# Altium PCB MADI_nRF52840_PCB_L4.PcbDoc (part 1 of 3)
Units mm, origin at the board's own origin, x right, y up, seen from the top; angles counter-clockwise.
Board outline 30 x 21.59 mm, 4 copper layers (L1, L2 (GND), L3 (GND), L4), stack 1.525 mm thick; 59 components, 58 nets, 307 pads, 195 vias.
Unrouted connection lines stored in the file: 114.
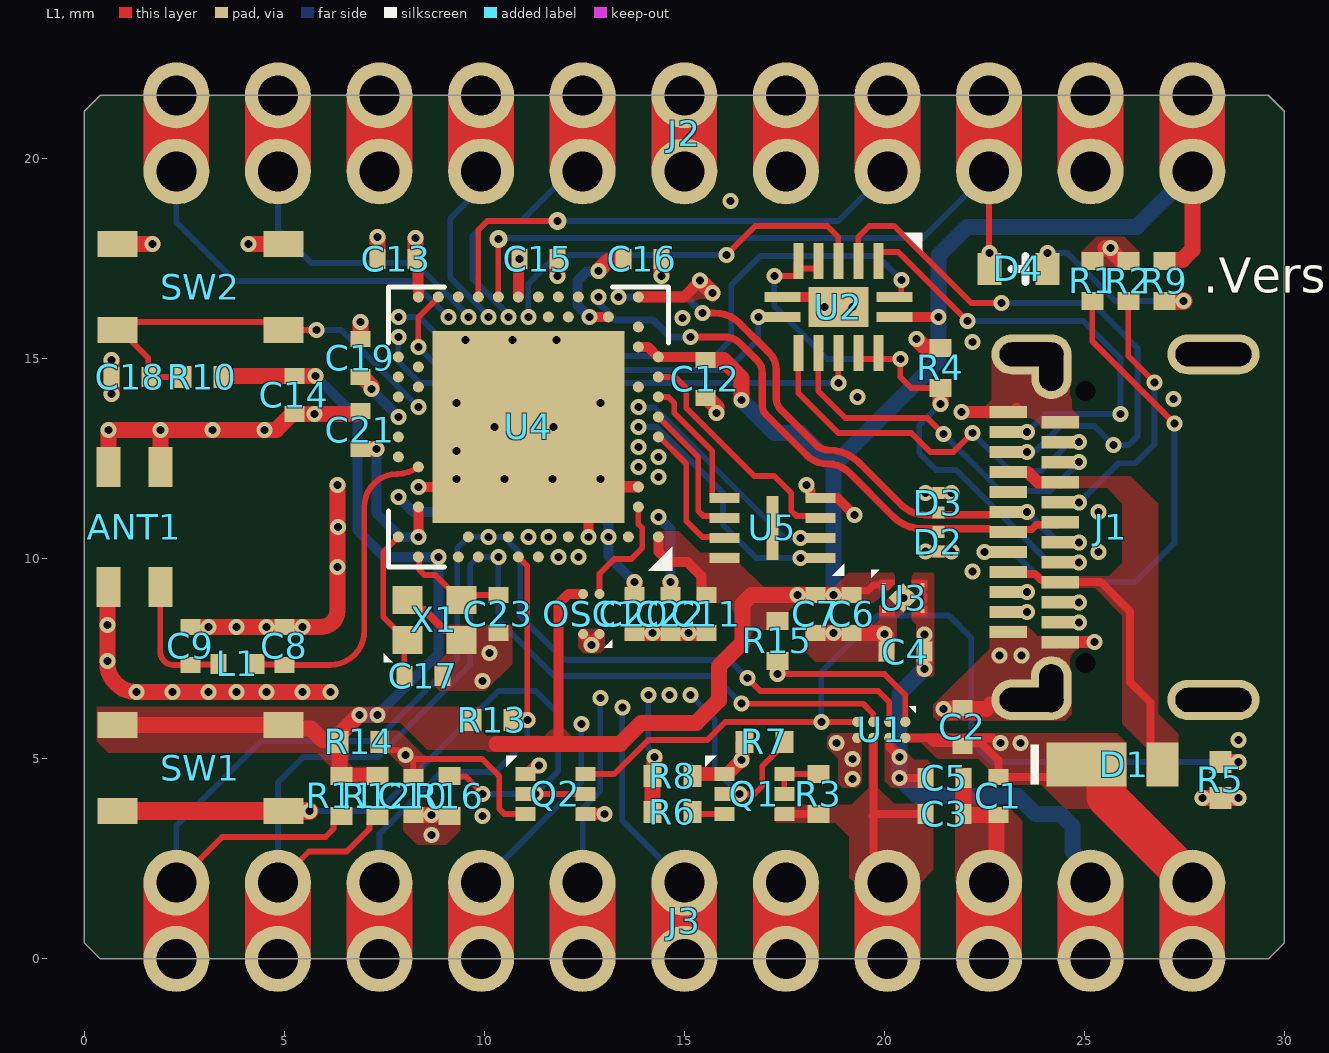
[diagram p0: L1 view]
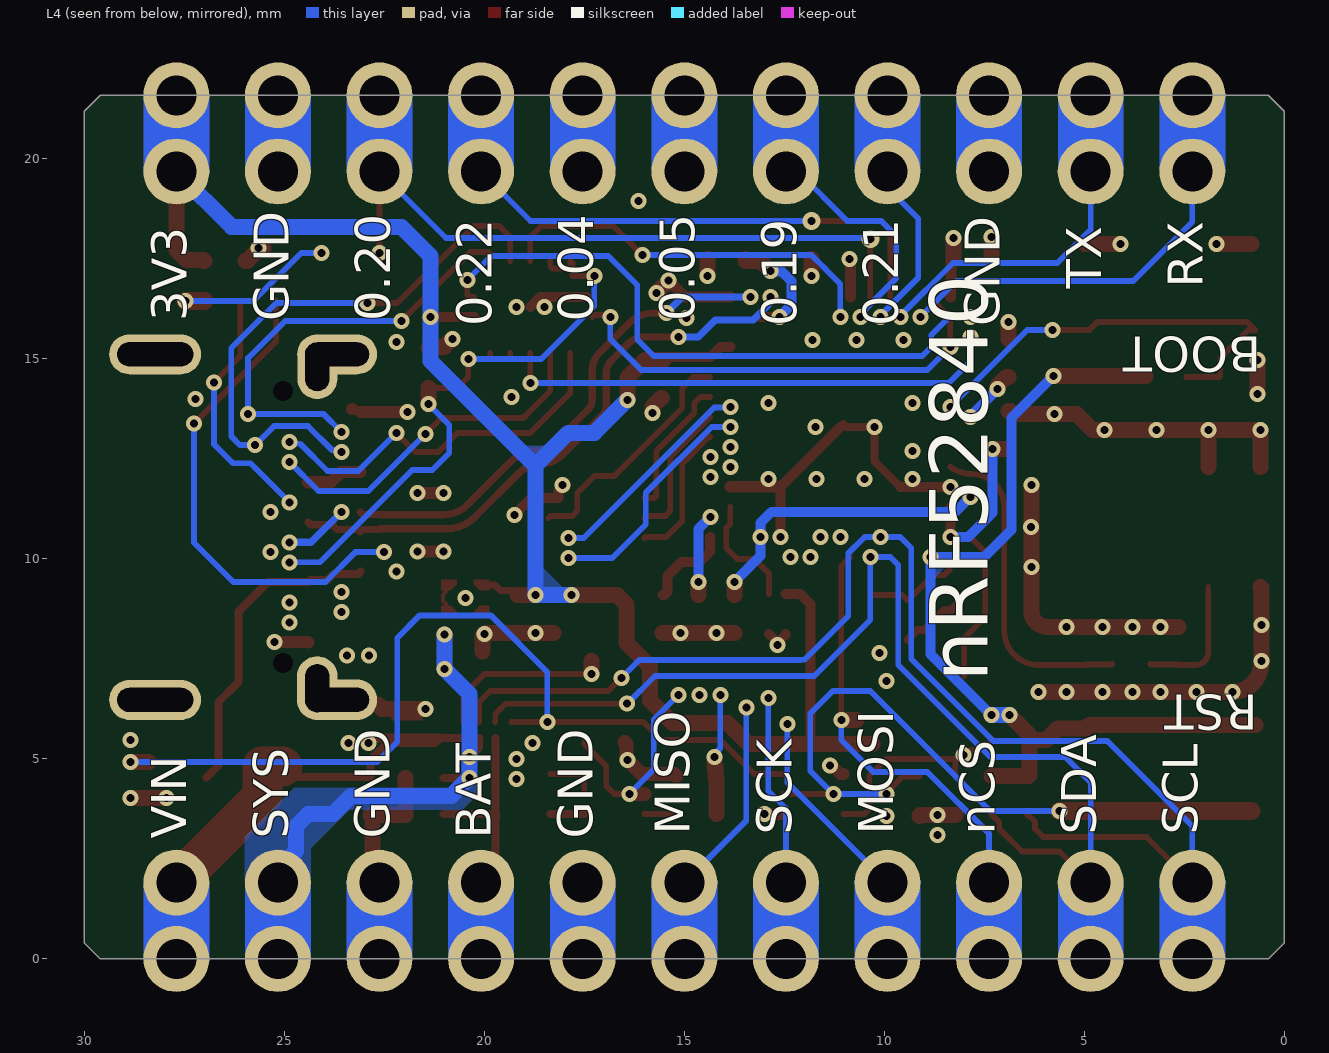
[diagram p1: L4 view, seen from below]
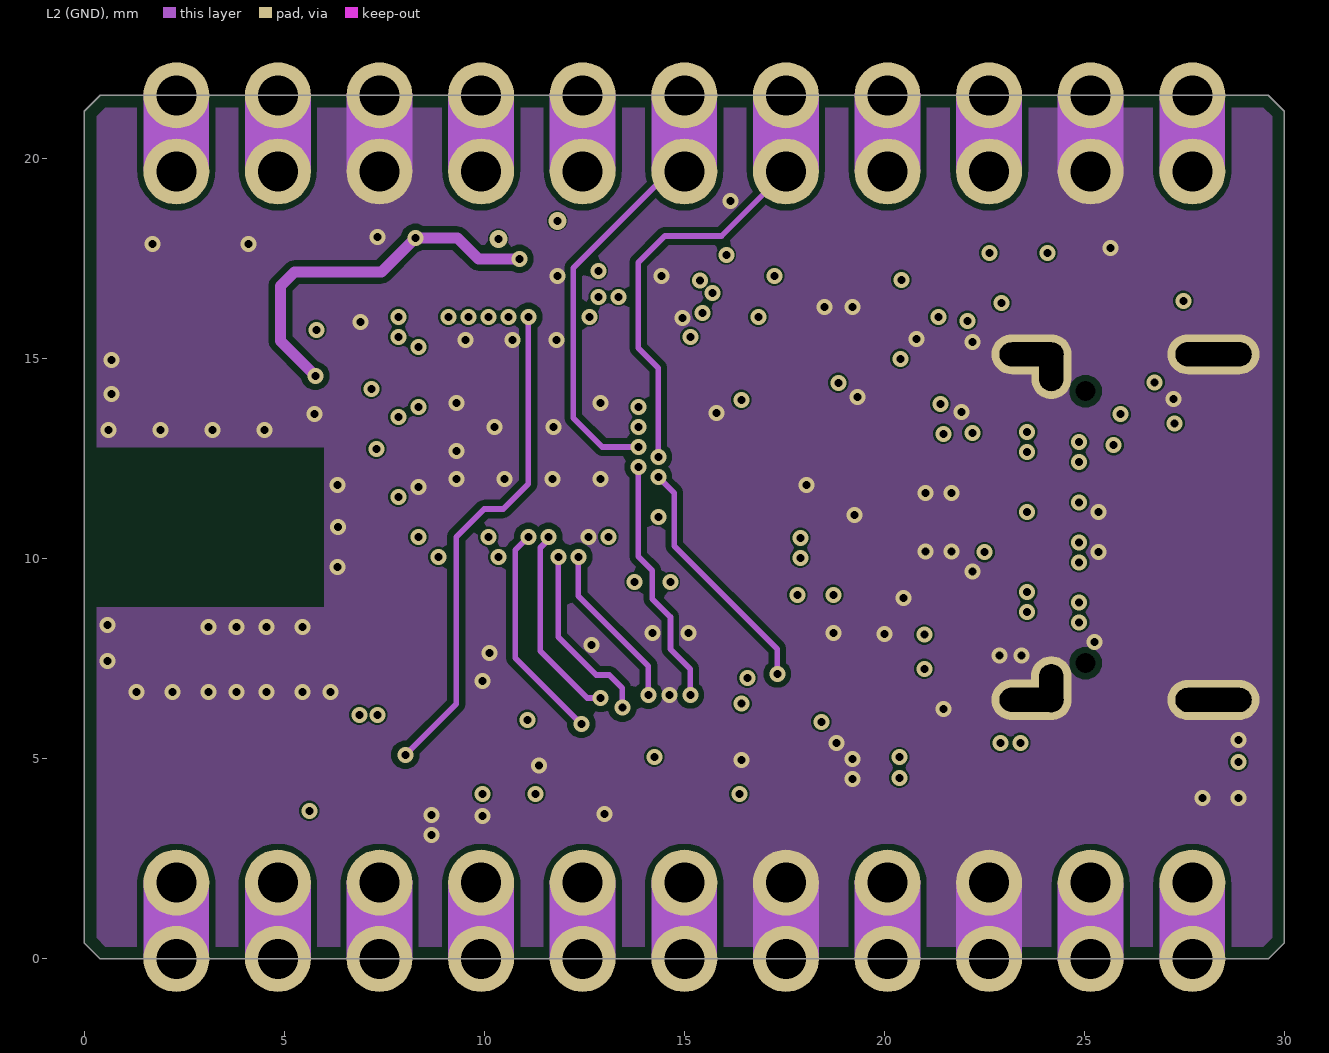
[diagram p2: L2 (GND)]
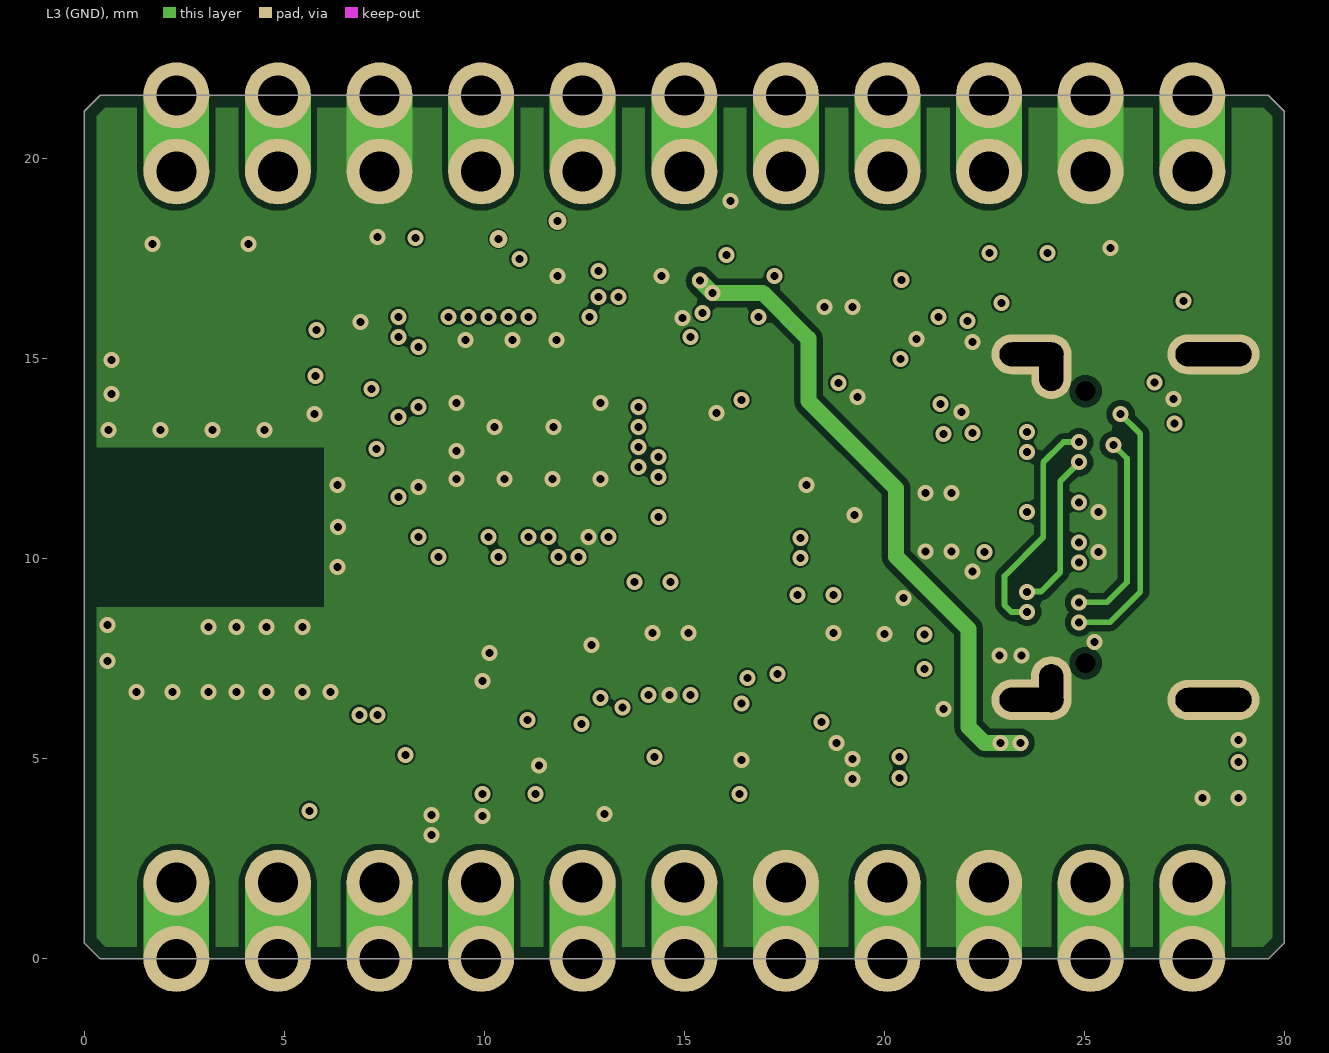
[diagram p3: L3 (GND)]
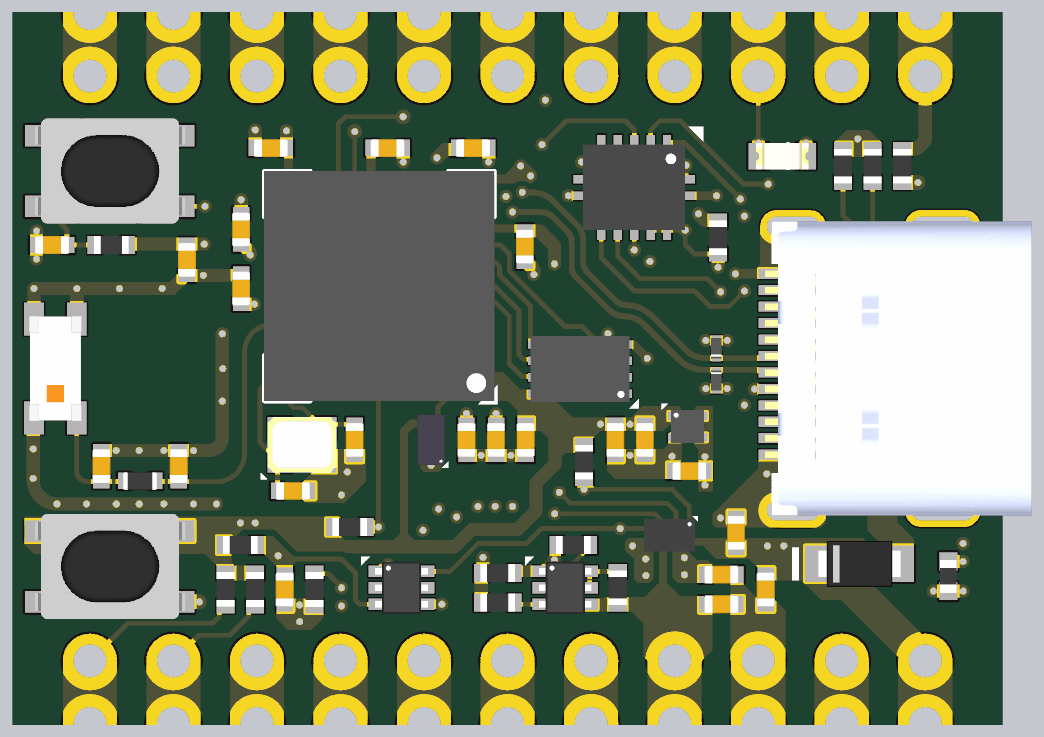
[diagram p5: 3D render of the assembled board from above, using the file's embedded part models]

## Layer stack, top to bottom
Top Solder: solder mask 0.02, Solder Resist, Dk 4.2
L1: signal copper 0.0175
Dielectric 1: prepreg 0.11, ?, Dk 4.5
L2 (GND): signal copper 0.035
Dielectric 2: core 1.2, FR-4, Dk 4.5
L3 (GND): signal copper 0.035
Dielectric 3: prepreg 0.11, ?, Dk 4.5
L4: signal copper 0.0175
Bottom Solder: solder mask 0.02, Solder Resist, Dk 4.2

## Board outline
0,0.4 0.4,0 29.6,0 30,0.4 30,21.19 29.6,21.59 0.4,21.59 0,21.19

## Design rules (kind name [scope] priority, off if disabled: settings)
AcuteAngle [All] p1: minimum=4.49000000000000E+0001 checktracksonly=FALSE
BoardOutlineClearance BoardOutlineClearance_Silk [OnLayer('Top Overlay') or OnLayer('Bottom Overlay')] p1: gap=0 ignorepadtopadclearanceinfootprint=FALSE
BoardOutlineClearance BoardOutlineClearance_EdgeComponents [InComponent('J3')or InComponent('J2')] p2: gap=0 ignorepadtopadclearanceinfootprint=FALSE
BoardOutlineClearance BoardOutlineClearance_Text [IsText] p3: gap=0 ignorepadtopadclearanceinfootprint=FALSE
BoardOutlineClearance [All] p4: gap=0.3 ignorepadtopadclearanceinfootprint=FALSE
Clearance Clearance_Fiducials [InComponentClass('Fiducial') vs InComponentClass('Fiducial')] p1: gap=0 ignorepadtopadclearanceinfootprint=FALSE
Clearance "Clearance_Track and Track" [IsTrack vs IsTrack] p2: gap=0.15 ignorepadtopadclearanceinfootprint=FALSE
Clearance Clearance_NPTH [(InPadClass('NPTH'))] p3: gap=0.2 ignorepadtopadclearanceinfootprint=FALSE
Clearance Clearance_ThruPin [IsThruPin and Not InAnyComponent] p4: gap=0.25 ignorepadtopadclearanceinfootprint=FALSE
Clearance "Clearance_Poly to All" [IsRegion and (not InAnyComponent)] p5: gap=0.15 ignorepadtopadclearanceinfootprint=TRUE
Clearance [All] p6: gap=0.1 ignorepadtopadclearanceinfootprint=FALSE
ComponentClearance ComponentClearance_SW1_SW2 [InComponent('SW1') or InComponent('SW2') vs InComponent('J2') or InComponent('J3')] p1: gap=0 collisioncheckmode=3 verticalgap=0 showdistances=FALSE
ComponentClearance ComponentClearance_U4 [InComponent('U4') vs InComponent('U4')] p2: gap=0 collisioncheckmode=3 verticalgap=0 showdistances=FALSE
ComponentClearance [All] p3: gap=0.1 collisioncheckmode=3 verticalgap=0 showdistances=FALSE
DiffPairsRouting [All] p1: maxlimit=0.17 minlimit=0.1 mostfreqgap=0.17 toplayer_mingap=0.17 toplayer_minwidth=0.18 toplayer_maxwidth=0.18 toplayer_prefwidth=0.18 bottomlayer_mingap=0.17 bottomlayer_minwidth=0.18 bottomlayer_maxwidth=0.18 bottomlayer_prefwidth=0.18 impedanceprofiledriven=TRUE impedanceprofileid={6465BEDB-63ED-48EF-AFED-AA02275A4435} impedanceprofilevalue=90.000000 maxuncoupledlength=12.7
HoleSize [All] p1: absolutevalues=TRUE maxlimit=6.5 minlimit=0.2 maxpercent=80.000 minpercent=20.000
HoleToHoleClearance HoleToHoleClearance_J1 [InComponent('J1') vs InComponent('J1')] p1: gap=0 allowstackedmicrovias=TRUE
HoleToHoleClearance HoleToHoleClearance_1 [All] p2: gap=0.2 allowstackedmicrovias=TRUE
Length [InNetClass('Xtal')] p1: maxlimit=2540 minlimit=0
MinimumAnnularRing MinimumAnnularRing_ThermalPadVias [IsVia and InAnyComponent] p1: minimumring=0.1
MinimumAnnularRing [All] p2: minimumring=0.1
MinimumSolderMaskSliver [All] p1: minsoldermaskwidth=0.03
PlaneClearance [All] p1: clearance=0.2
PlaneConnect "PlaneConnect_GND to PAD" [(InNet('GND') and IsPad)] p1: planeconnectstyle=Relief reliefexpansion=0.3 reliefentries=4 reliefconductorwidth=0.5 reliefairgap=0.2
PlaneConnect [All] p2: planeconnectstyle=Direct reliefexpansion=0.508 reliefentries=4 reliefconductorwidth=0.254 reliefairgap=0.254
PolygonConnect [All] p1: connectstyle=Direct reliefconductorwidth=0.254 reliefentries=4 polygonreliefangle="90 Angle" airgapwidth=0.254
RoutingVias ThermalPadVias [IsVia and InAnyComponent] p1: holewidth=0.2 width=0.45 viastyle="Through Hole" minholewidth=0.2 minwidth=0.4 maxholewidth=0.25 maxwidth=0.5
RoutingVias [All] p2: holewidth=0.3 width=0.6 viastyle="Through Hole" minholewidth=0.2 minwidth=0.4 maxholewidth=0.4 maxwidth=0.8
SMDEntry [All] p1: side=TRUE corner=TRUE anyangle=TRUE
SilkToSilkClearance [All] p1: silktosilkclearance=0
SilkToSolderMaskClearance [IsPad] p1: minsilkscreentomaskgap=0 clearancetoexposedcopper=TRUE
SolderMaskExpansion [All] p1: expansion=0.07 istentingtop=FALSE useseparateexpansions=TRUE expansionbottom=0.07 istentingbottom=FALSE
Width Width_Power [InNet('+*') or InNet('GND')] p1: maxlimit=2.5 minlimit=0.1 preferedwidth=0.4
Width [All] p2: maxlimit=2.5 minlimit=0.1 preferedwidth=0.146 minimp=50.000000 maximp=50.000000 favimp=50.000000
21 further rules are at their usual default settings.

## Classes and differential pairs
net class "GPIO Restrictions": NetU4_A8 NetU4_A10 NetU4_A12 NetU4_A16 NetU4_A20 NetU4_B9 NetU4_B13 NetU4_B15 NetU4_B17 NetU4_B19 NetU4_J24 NetU4_L24 NetU4_P23 NetU4_R24 NetU4_T23 NetU4_U24 NetU4_V23 NetU4_W24 NetU4_Y23 P0.03/SPI_MOSI P0.29/SPI_MISO P0.31/VBAT_MON P1.07/BUTTON P1.12/I2C_SCL P1.13/I2C_SDA SWO
differential pair class DIFF90: USB_D
differential pair USB_D: +USB_D_P -USB_D_N

## Components (designator, comment, footprint, x,y, rotation, side; value= is the part's Value field where it differs from the comment)
ANT1 "2450AT18D0100E" 2450AT18D0100E 1.25,10.795 r90 top
C1 "4.7uF" CAPC1005X06N 22.85,4.075 r90 top
C2 "100nF" CAPC1005X06N 21.95,5.8 r270 top
C3 "1uF" CAPC1005X06N 21.5,3.625 r180 top
C4 "4.7uF" CAPC1005X06N 20.525,7.68 r0 top
C5 "100nF" CAPC1005X06N 21.5,4.525 r180 top
C6 "100nF" CAPC1005X06N 19.175,8.625 r90 top
C7 "1uF" CAPC1005X06N 18.275,8.625 r90 top
C8 "0.8pF" CAPC1005X06N 5,7.825 r270 top
C9 "0.5pF" CAPC1005X06N 2.65,7.825 r270 top
C10 "1uF" CAPC1005X06N 8.225,4.075 r90 top
C11 "1uF" CAPC1005X06N 15.55,8.625 r90 top
C12 "4.7uF" CAPC1005X06N 15.525,14.5 r90 top
C13 "100nF" CAPC1005X06N 7.8,17.5 r0 top
C14 "100nF" CAPC1005X06N 5.25,14.1 r90 top
C15 "100nF" CAPC1005X06N 11.35,17.5 r180 top
C16 "4.7uF" CAPC1005X06N 13.95,17.5 r180 top
C17 "8pF" CAPC1005X06N 8.475,7.075 r0 top
C18 "100nF" CAPC1005X06N 1.15,14.55 r0 top
C19 "1nF" CAPC1005X06N 6.9,15.025 r270 top
C20 "1uF" CAPC1005X06N 13.75,8.625 r90 top
C21 "100pF" CAPC1005X06N 6.9,13.225 r270 top
C22 "100nF" CAPC1005X06N 14.65,8.625 r90 top
C23 "8pF" CAPC1005X06N 10.35,8.625 r270 top
D1 "CUHS20F30,H3F" US2H-DIODE 25.7,4.855 r0 top
D2 "TPESD0201G05V" DIOC0603X03N 21.35,10.43 r270 top
D3 "TPESD0201G05V" DIOC0603X03N 21.35,11.405 r90 top
D4 "YLWGREEN" LDIOC1608X08N 23.35,17.25 r180 top
J1 "TYPEC-324G-BCP24" KUSBX-SMT3-CS-BTR_KYC 26.881,10.795 r90 top locked
J2 "Double_Header_1x11_2.54" 1x11_DOUBLE_HEADER_2.54 15,21.59 r180 top
J3 "Double_Header_1x11_2.54" 1x11_DOUBLE_HEADER_2.54 15,1.905 r180 top
L1 "4.7nH" INDC1005X05N 3.825,7.375 r180 top
OSC1 "SIT1532AC-J5-DCC-32.768E" SIT1532 12.675,8.625 r90 top
Q1 "EM6M2T2R" SOTFL50P160X55-6N 16.75,4.125 r0 top
Q2 "EM6K7T2R" SOTFL50P160X55-6N 11.775,4.125 r0 top
R1 "5.1K" RESC1005X04N 25.2,16.95 r270 top
R2 "5.1K" RESC1005X04N 26.1,16.95 r270 top
R3 "10K" RESC1005X04N 18.35,4.125 r270 top
R4 "10K" RESC1005X04N 21.4,14.775 r270 top
R5 "10K NTC" NTC1005X05N 28.4,4.475 r90 top value=10kR
R6 "360K" RESC1005X04N 14.7,3.675 r0 top value=360kR
R7 "10K" RESC1005X04N 17,5.425 r0 top
R8 "56K" RESC1005X04N 14.7,4.575 r180 top
R9 "510R" RESC1005X04N 27,16.95 r90 top
R10 "10K" RESC1005X04N 2.95,14.55 r0 top
R11 "10K" RESC1005X04N 6.428,4.076 r90 top
R12 "10K" RESC1005X04N 7.325,4.075 r90 top
R13 "10K" RESC1005X04N 10.2,5.975 r180 top
R14 "10K" RESC1005X04N 6.875,5.425 r180 top
R15 "10K" RESC1005X04N 17.325,7.95 r90 top
R16 "10K" RESC1005X04N 9.125,4.075 r90 top
SW1 "SKRPACE010" PTS810 2.9,4.775 r180 top
SW2 "SKRPACE010" PTS810 2.9,16.8 r180 top
U1 "BQ25180YBGR" BGA8C40P2X4_100X155X50_YBG0008 19.925,5.725 r270 top
U2 "74LVC4066BQ,115" QFN50P250X300X100_HS-15N 18.85,16.3 r270 top
U3 "NCP167BMX330TBG" NCP167 20.475,9.025 r0 top
U4 "NRF52840-QIAA-R" NORDIC_NRF52840-QIAA-R7 11.1,13.3 r180 top
U5 "MX25R1635FZUIL0" USON8_3X2 17.2,10.775 r180 top
X1 "32 MHz" XT2016_ECS 8.75,8.475 r0 top

## Footprints (in the part's own frame and the unit in brackets; to place one, negate y for a bottom-side part, rotate by r counter-clockwise, add the part's x,y. Pads: shape width x height; smd on the part's side, far side on the other; paste and mask are expansions set on the pad)
1x11_DOUBLE_HEADER_2.54 [mm]
  round 1.65 hole 1: 1(-12.7,0) 1(-12.7,1.905) 2(-10.16,0) 2(-10.16,1.905) 3(-7.62,0) 3(-7.62,1.905) 4(-5.08,0) 4(-5.08,1.905) 5(-2.54,1.905) 5(-2.54,0) 6(0,1.905) 6(0,0) 7(2.54,1.905) 7(2.54,0) 8(5.08,0) 8(5.08,1.905) 9(7.62,0) 9(7.62,1.905) 10(10.16,0) 10(10.16,1.905) 11(12.7,0) 11(12.7,1.905)
  Multi-Layer region: -13.523,0 -11.875,0 -11.875,1.968 -13.523,1.968
  Multi-Layer region: -10.983,0 -9.335,0 -9.335,1.968 -10.983,1.968
  Multi-Layer region: 6.797,-0.063 8.445,-0.063 8.445,1.905 6.797,1.905
  Multi-Layer region: -8.443,-0.063 -6.795,-0.063 -6.795,1.905 -8.443,1.905
  Multi-Layer region: -5.903,-0.063 -4.255,-0.063 -4.255,1.905 -5.903,1.905
  Multi-Layer region: 1.717,-0.063 3.365,-0.063 3.365,1.905 1.717,1.905
  Multi-Layer region: 4.257,-0.063 5.905,-0.063 5.905,1.905 4.257,1.905
  Multi-Layer region: 9.337,-0.063 10.985,-0.063 10.985,1.905 9.337,1.905
  Multi-Layer region: 11.877,-0.063 13.525,-0.063 13.525,1.905 11.877,1.905
  Multi-Layer region: -0.823,-0.063 0.825,-0.063 0.825,1.905 -0.823,1.905
  Multi-Layer region: -3.363,-0.063 -1.715,-0.063 -1.715,1.905 -3.363,1.905
2450AT18D0100E [mm]
  rect 1x0.6 smd mask+0.05: 1(-1.5,-0.65) 2(1.5,-0.65) 3(1.5,0.65) 4(-1.5,0.65)
  body extent -1.6,-0.8 1.6,0.8, height 1.31
BGA8C40P2X4_100X155X50_YBG0008 [mm] "BGA, 8-Leads, Body 1.00x1.55mmx0.50mm, Pitch 0.40mm"
  round 0.26 smd paste-10 mask+0.05: A1(-0.2,0.6) A2(0.2,0.6) B1(-0.2,0.2) B2(0.2,0.2) C1(-0.2,-0.2) C2(0.2,-0.2) D1(-0.2,-0.6) D2(0.2,-0.6)
  silkscreen extent -0.59,0.69 -0.41,0.86, body extent -0.5,-0.77 0.5,0.77, height 0.5
CAPC1005X06N [mm] "Chip Capacitor, 2-Leads, Body 1.00x0.50mm, IPC Medium Density"
  rect 0.4x0.5 smd mask+0.07: 1(-0.475,0) 2(0.475,0)
  L1 pour cut-out: -0.275,0.25 0.275,0.25 0.275,-0.25 -0.275,-0.25
  body extent -0.53,-0.28 0.53,0.28, height 0.55
DIOC0603X03N [mm] "Chip Diode, 2-Leads, Body 0.62x0.32mm, IPC Medium Density"
  rect 0.3x0.3 smd mask+0.05: 1(-0.245,0) 2(0.245,0)
  body extent -0.31,-0.16 0.31,0.16, height 0.34
INDC1005X05N [mm] "Chip Inductor, 2-Leads, Body 1.00x0.50mm, IPC Medium Density"
  rect 0.4x0.5 smd mask+0.07: 1(-0.475,0) 2(0.475,0)
  L1 pour cut-out: -0.275,0.25 0.275,0.25 0.275,-0.25 -0.275,-0.25
  body extent -0.53,-0.28 0.53,0.28, height 0.55
KUSBX-SMT3-CS-BTR_KYC [mil]
  round 0 hole 19.68 unplated mask+1.97: 0(-133.86,72.89) 0(133.86,72.89)
  rect 12x37 smd mask+1.97: A1(-103.15,148.87) A2(-83.46,148.87) A3(-63.78,148.87) A4(-44.09,148.87) A5(-24.41,148.87) A6(-4.72,148.87) A7(14.96,148.87) A8(34.65,148.87) A9(54.33,148.87) A10(74.02,148.87) A11(93.7,148.87) A12(113.39,148.87) B1(103.15,97.69) B2(83.47,97.69) B3(63.78,97.69) B4(44.09,97.69) B5(24.41,97.69) B6(4.72,97.69) B7(-14.96,97.69) B8(-34.65,97.69) B9(-54.33,97.69) B10(-74.02,97.69) B11(-93.7,97.69) B12(-113.39,97.69)
  oval 39.37x90.55 hole 23.62 slot 74.8 at 90 deg mask+1.97: S1(-170.08,-53.1) S2(170.08,-53.1)
  oval 40x79 hole 23.62 slot 62.99 at 90 deg mask+1.97: S3(-170,126)
  oval 63x40 hole 23.62 slot 47.24 at 0 deg mask+1.97: S3(-158.5,106.5)
  oval 63x39.37 hole 23.62 slot 47.24 at 0 deg mask+1.97: S4(157.52,106.5)
  oval 39.37x78.74 hole 23.62 slot 62.99 at 90 deg mask+1.97: S4(170,126)
  body extent -176,-159 176,160, height 129
LDIOC1608X08N [mm] "LED, 2-Leads, Body 1.60x0.80mm, IPC Medium Density"
  rect 0.6x0.8 smd mask+0.07: A(-0.725,0) K(0.725,0)
  silkscreen extent -0.18,-0.33 0.18,0.33, body extent -0.8,-0.4 0.8,0.4, height 0.56
NCP167 [mm]
  rect 0.1x0.1 smd paste-1 mask+0: 1(-0.48,0.325) 2(-0.48,-0.325) 3(0.48,-0.325) 4(0.48,0.325)
  rect 0.52x0.52 smd rot 135 paste-1 mask+0.05: 5(0,0)
  L1 region: 0.6,-0.455 0.21,-0.455 0.21,-0.345 0.36,-0.195 0.6,-0.195
  L1 region: -0.21,-0.345 -0.21,-0.455 -0.6,-0.455 -0.6,-0.195 -0.36,-0.195
  L1 region: -0.21,0.345 -0.36,0.195 -0.6,0.195 -0.6,0.455 -0.21,0.455
  L1 region: 0.6,0.195 0.36,0.195 0.21,0.345 0.21,0.455 0.6,0.455
  silkscreen extent -0.8,0.5 -0.6,0.7, body extent -0.5,-0.5 0.5,0.5, height 0.39
NORDIC_NRF52840-QIAA-R7 [mm]
  round 0.275 smd paste+0.012 mask+0.05: A8(-1.25,3.25) A10(-0.75,3.25) A12(-0.25,3.25) A14(0.25,3.25) A16(0.75,3.25) A18(1.25,3.25) A20(1.75,3.25) A22(2.25,3.25) A23(2.75,3.25) AA24(3.25,-2.25) AB2(-2.75,-2.5) AC5(-2,-2.75) AC9(-1,-2.75) AC11(-0.5,-2.75) AC13(0,-2.75) AC15(0.5,-2.75) AC17(1,-2.75) AC19(1.5,-2.75) AC21(2,-2.75) AC24(3.25,-2.75) AD2(-2.75,-3.25) AD4(-2.25,-3.25) AD6(-1.75,-3.25) AD8(-1.25,-3.25) AD10(-0.75,-3.25) AD12(-0.25,-3.25) AD14(0.25,-3.25) AD16(0.75,-3.25) AD18(1.25,-3.25) AD20(1.75,-3.25) AD22(2.25,-3.25) AD23(2.75,-3.25) B1(-3.25,2.75) B3(-2.5,2.75) B5(-2,2.75) B7(-1.5,2.75) B9(-1,2.75) B11(-0.5,2.75) B13(0,2.75) B15(0.5,2.75) B17(1,2.75) B19(1.5,2.75) B24(3.25,2.75) C1(-3.25,2.25) D2(-2.75,2) D23(2.75,2) E24(3.25,1.75) F2(-2.75,1.5) F23(2.75,1.5) G1(-3.25,1.25) H2(-2.75,1) H23(2.75,1) J1(-3.25,0.75) J24(3.25,0.75) K2(-2.75,0.5) L1(-3.25,0.25) L24(3.25,0.25) M2(-2.75,0) N1(-3.25,-0.25) N24(3.25,-0.25) P2(-2.75,-0.5) P23(2.75,-0.5) R1(-3.25,-0.75) R24(3.25,-0.75) T2(-2.75,-1) T23(2.75,-1) U1(-3.25,-1.25) U24(3.25,-1.25) V23(2.75,-1.5) W1(-3.25,-1.75) W24(3.25,-1.75) Y2(-2.75,-2) Y23(2.75,-2)
  rect 4.8x4.8 smd paste-3 mask+0.05: EXP(0,0)
  silkscreen extent -3.6,-3.5 3.5,3.6, body extent -3.5,-3.5 3.5,3.5, height 0.86
NTC1005X05N [mm] "NTC, 2-Leads, Body 1.00x0.50mm, IPC Medium Density"
  rect 0.55x0.55 smd mask+0.07: 1(-0.45,0) 2(0.45,0)
  L1 pour cut-out: -0.175,0.275 0.175,0.275 0.175,-0.275 -0.175,-0.275
  body extent -0.5,-0.25 0.5,0.25, height 0.5
PTS810 [mm]
  rect 1x0.65 smd: 1(-2.075,1.075) 2(2.075,1.075) 3(-2.075,-1.075) 4(2.075,-1.075)
  body extent -2.3,-1.6 2.28,1.6, height 2.51
QFN50P250X300X100_HS-15N [mm] "QFN, 14-Leads, Body 2.50x3.00mm, Pitch 0.50mm, Thermal Pad 1.00x1.50mm, IPC Medium Density"
  rect 0.25x0.9 smd mask+0.05: 1(-0.25,1.4) 7(-0.25,-1.4) 8(0.25,-1.4) 14(0.25,1.4)
  rect 0.9x0.25 smd mask+0.05: 2(-1.15,1) 3(-1.15,0.5) 4(-1.15,0) 5(-1.15,-0.5) 6(-1.15,-1) 9(1.15,-1) 10(1.15,-0.5) 11(1.15,0) 12(1.15,0.5) 13(1.15,1)
  rect 1x1.5 smd mask+0.05: 15(0,0)
  silkscreen extent -1.85,1.65 -1.4,2.1, body extent -1.3,-1.55 1.3,1.55, height 1
RESC1005X04N [mm] "Chip Resistor, 2-Leads, Body 1.00x0.50mm, IPC Medium Density"
  rect 0.45x0.55 smd mask+0.05: 1(-0.5,0) 2(0.5,0)
  L1 pour cut-out: -0.275,0.275 0.275,0.275 0.275,-0.275 -0.275,-0.275
  body extent -0.53,-0.28 0.53,0.28, height 0.35
SIT1532 [mm]
  round 0.25 smd mask+0.05: 1(-0.5,-0.205) 2(0.5,-0.205) 3(0.5,0.205) 4(-0.5,0.205)
  silkscreen extent -0.85,-0.53 -0.65,-0.33, body extent -0.77,-0.42 0.77,0.42, height 0.61
SOTFL50P160X55-6N [mm] "SOTFL, 6-Leads, Body 1.60x1.60mm, Pitch 0.50mm, IPC Medium Density"
  rect 0.5x0.35 smd mask+0.05: 1(-0.75,0.5) 2(-0.75,0) 3(-0.75,-0.5) 4(0.75,-0.5) 5(0.75,0) 6(0.75,0.5)
  silkscreen extent -1.23,0.67 -0.95,0.95, body extent -0.8,-0.8 0.8,0.8, height 0.55
US2H-DIODE [mm] "SODFL, 2-Leads, Body 1.60x3.50mm, IPC Medium Density"
  rect 2x1.1 smd: 1(-0.65,0)
  rect 0.8x1.1 smd: 2(1.25,0)
  silkscreen extent -2.05,-0.5 -1.84,0.5, body extent -1.25,-0.7 1.25,0.7, height 0.61
USON8_3X2 [mm]
  rect 0.75x0.254 smd mask+0.05: 1(-1.2,0.75) 2(-1.2,0.25) 3(-1.2,-0.25) 4(-1.2,-0.75) 5(1.2,-0.75) 6(1.2,-0.25) 7(1.2,0.25) 8(1.2,0.75)
  rect 0.3x1.6 smd mask+0.05: 9(0,0)
  silkscreen extent -1.8,0.9 -1.5,1.2, body extent -1.5,-1 1.5,1, height 0.61
XT2016_ECS [mm]
  rect 0.75x0.7 smd mask+0.05: 1(-0.675,-0.5) 2(0.675,-0.5) 3(0.675,0.5) 4(-0.675,0.5)
  silkscreen extent -1.26,-1.06 -1.04,-0.84, body extent -1.05,-0.85 1.05,0.85, height 0.56

## Part data
ANT1: "RF ANT 2.4GHZ CHIP SOLDER SMD", Case/Package=SMD/SMT, Frequency=2.45GHz, Manufacturer=Johanson, Max Power Dissipation=2W, Package Quantity=3000, Supplier Part Number 1=712-1573-1-ND, Bandwidth=100MHz, Category="RF Antennas", ComponentLink1Description=https://datasheet.ciiva.com/29647/2450at18d0100-29647392.pdf?src-supplier=Digi-Key, ComponentLink1URL=https://datasheet.ciiva.com/29647/2450at18d0100-29647392.pdf?src-supplier=Digi-Key, ComponentLink2Description=https://datasheet.ciiva.com/24046/antenna-2450at18d0100-v3-258090-24046431.pdf?src-supplier=Mouser, ComponentLink2URL=https://datasheet.ciiva.com/24046/antenna-2450at18d0100-v3-258090-24046431.pdf?src-supplier=Mouser, Gain=-1dB, Height=0.047inch, Impedance=50R, Length=3.2mm, Manufacturer Part Number=2450AT18D0100E, Mount="Surface Mount", Number of Bands=1, Packaging="Tape and Reel", Power Rating=2W, Pricing 1="1=0.67000, 10=0.58900, 25=0.55360, 100=0.45190, 250=0.41972, 500=0.35720, 1000=0.28576 (USD)", Radiation Hardening=No, Return Loss=-10dB, RoHS=Yes, RoHS Compliant=Yes, Series=-, Stock 1=488138, Supplier 1=Digi-Key, Termination=Solder, Width=1.6mm
C1 C4 C12 C16: library part CL05A475MP5NRNC, "CAP CER 4.7UF 10V X5R 0402", Case Code (Imperial)=0402, Case Code (Metric)=1005, Dielectric=X5R, Manufacturer=Samsung, Max Operating Temperature=85°C, Min Operating Temperature=-55°C, Package Quantity=10000, Supplier Part Number 1=1276-1482-1-ND, Tolerance=20%, Voltage Rating=10V, Capacitance=4.7uF, Case/Package=0402, Category="Ceramic Capacitors", ComponentLink1Description=https://datasheet.ciiva.com/25786/cl05a475mp5nrnc-25786963.pdf?src-supplier=Digi-Key, ComponentLink1URL=https://datasheet.ciiva.com/25786/cl05a475mp5nrnc-25786963.pdf?src-supplier=Digi-Key, ComponentLink2Description=https://datasheet.ciiva.com/16437/cl05b104kq5nnnc-16437353.pdf?src-supplier=Future+Electronics, ComponentLink2URL=https://datasheet.ciiva.com/16437/cl05b104kq5nnnc-16437353.pdf?src-supplier=Future+Electronics, Lead Free="Lead Free", Length=0.039inch, Manufacturer Part Number=CL05A475MP5NRNC, Mount="Surface Mount", Packaging="Tape and Reel", Pricing 1="1=0.10000, 10=0.06800, 50=0.03680, 100=0.03010, 500=0.02150, 1000=0.01689, 2500=0.01535, 5000=0.01412 (USD)", RoHS=Yes, RoHS Compliant=Yes, Series=CL, Stock 1=6997940, Supplier 1=Digi-Key, Thickness=0.022inch, Width=0.02inch
C2 C5 C6 C13 C14 C15 C18 C22: library part CL05B104KO5NNNC, "CAP CER 0.1UF 16V X7R 0402", Case Code (Imperial)=0402, Case Code (Metric)=1005, Dielectric=X7R, Manufacturer=Samsung, Max Operating Temperature=125°C, Min Operating Temperature=-55°C, Package Quantity=1, Supplier Part Number 1=1276-1001-1-ND, Tolerance=10%, Voltage=16V, Capacitance=100nF, Case/Package=0402, Category="Ceramic Capacitors", ComponentLink1Description=https://datasheet.ciiva.com/26920/getdatasheetpartid-359683-26920169.pdf?src-supplier=Verical, ComponentLink1URL=https://datasheet.ciiva.com/26920/getdatasheetpartid-359683-26920169.pdf?src-supplier=Verical, ComponentLink2Description=https://datasheet.ciiva.com/29198/458718-da-01-en-vs-kondensator-0402-29198423.pdf?src-supplier=Conrad, ComponentLink2URL=https://datasheet.ciiva.com/29198/458718-da-01-en-vs-kondensator-0402-29198423.pdf?src-supplier=Conrad, ComponentLink3Description=https://datasheet.ciiva.com/16208/cl05b104kq5nnnc-16208343.pdf?src-supplier=Future+Electronics, ComponentLink3URL=https://datasheet.ciiva.com/16208/cl05b104kq5nnnc-16208343.pdf?src-supplier=Future+Electronics, ComponentLink4Description=https://datasheet.ciiva.com/26309/mlcc-catalogdownload2013-eng-26309003.pdf?src-supplier=Distrelec, ComponentLink4URL=https://datasheet.ciiva.com/26309/mlcc-catalogdownload2013-eng-26309003.pdf?src-supplier=Distrelec, Contact Plating=Tin, Depth=0.5mm, Height=0.5mm, Lead Free="Lead Free", Length=1mm, Manufacturer Part Number=CL05B104KO5NNNC, Material=Ceramic, Mount="Surface Mount", Packaging="Tape and Reel", Pricing 1="1=0.10000, 10=0.02600, 50=0.01400, 100=0.01150, 500=0.00820, 1000=0.00644, 2500=0.00586, 5000=0.00539 (USD)", Radiation Hardening=No, RoHS=Yes, Stock 1=21029609, Supplier 1=Digi-Key, Thickness=0.022inch, Voltage Rating=16V, Voltage Rating (DC)=16V, Width=0.02inch
C3 C7 C10 C11 C20: library part CL05A105KO5NNNC, "CAP CER 1UF 16V X5R 0402", Case Code (Imperial)=0402, Case Code (Metric)=1005, Dielectric=X5R, Manufacturer=Samsung, Max Operating Temperature=85°C, Min Operating Temperature=-55°C, Package Quantity=1, Supplier Part Number 1=1276-1067-1-ND, Tolerance=10%, Voltage=16V, Capacitance=1uF, Case/Package=0402, Category="Ceramic Capacitors", ComponentLink1Description=https://datasheet.ciiva.com/16207/cl05a105ko5nnnc-16207571.pdf?src-supplier=Future+Electronics, ComponentLink1URL=https://datasheet.ciiva.com/16207/cl05a105ko5nnnc-16207571.pdf?src-supplier=Future+Electronics, ComponentLink2Description=https://datasheet.ciiva.com/15195/getdatasheetpartid-355272-15195629.pdf?src-supplier=Verical, ComponentLink2URL=https://datasheet.ciiva.com/15195/getdatasheetpartid-355272-15195629.pdf?src-supplier=Verical, Contact Plating=Tin, Depth=0.5mm, Height=0.5mm, Length=1mm, Manufacturer Part Number=CL05A105KO5NNNC, Mount="Surface Mount", Packaging="Tape and Reel", Pricing 1="1=0.10000, 10=0.04400, 50=0.02400, 100=0.01960, 500=0.01402, 1000=0.01101, 2500=0.01001, 5000=0.00921 (USD)", Radiation Hardening=No, RoHS=Yes, Stock 1=2455652, Supplier 1=Digi-Key, Thickness=0.022inch, Voltage Rating=16V, Width=0.02inch
C8: library part GJM1555C1HR80BB01D, "CAP CER 0.8PF 50V C0G/NP0 0402", Case Code (Imperial)=0402, Case Code (Metric)=1005, Dielectric=C0G, Manufacturer=Murata, Max Operating Temperature=125°C, Min Operating Temperature=-55°C, Package Quantity=1, Supplier Part Number 1=490-6080-1-ND, Voltage=50V, Capacitance=0.8pF, Case/Package=0402, Category="Ceramic Capacitors", ComponentLink1Description=https://datasheet.ciiva.com/6270/product-6270516.pdf?src-supplier=Digi-Key, ComponentLink1URL=https://datasheet.ciiva.com/6270/product-6270516.pdf?src-supplier=Digi-Key, ComponentLink2Description=https://datasheet.ciiva.com/18183/getdatasheetpartid-75095-18183863.pdf?src-supplier=Verical, ComponentLink2URL=https://datasheet.ciiva.com/18183/getdatasheetpartid-75095-18183863.pdf?src-supplier=Verical, ComponentLink3Description=https://datasheet.ciiva.com/6270/partnumbering-e-01-6270517.pdf?src-supplier=Digi-Key, ComponentLink3URL=https://datasheet.ciiva.com/6270/partnumbering-e-01-6270517.pdf?src-supplier=Digi-Key, ComponentLink4Description=https://datasheet.ciiva.com/16440/l0005e-16440469.pdf?src-supplier=Future+Electronics, ComponentLink4URL=https://datasheet.ciiva.com/16440/l0005e-16440469.pdf?src-supplier=Future+Electronics, ComponentLink5Description=https://datasheet.ciiva.com/11616/product-11616838.pdf?src-supplier=Avnet, ComponentLink5URL=https://datasheet.ciiva.com/11616/product-11616838.pdf?src-supplier=Avnet, ComponentLink6Description=https://datasheet.ciiva.com/6270/partnumbering-e-01-6270552.pdf?src-supplier=Digi-Key, ComponentLink6URL=https://datasheet.ciiva.com/6270/partnumbering-e-01-6270552.pdf?src-supplier=Digi-Key, Construction=Flat, Depth=0.5mm, Height=0.5mm, Lead Free="Lead Free", Length=1mm, Manufacturer Part Number=GJM1555C1HR80BB01D, Mount="Surface Mount", Packaging="Tape and Reel", Pricing 1="1=0.20000, 10=0.13900, 50=0.07920, 100=0.06560, 500=0.04596, 1000=0.03805, 2500=0.03542, 5000=0.03240 (USD)", Radiation Hardening=No, RoHS=Yes, RoHS Compliant=Yes, Series=GJM, Stock 1=91134, Supplier 1=Digi-Key, Termination=SMD/SMT, Thickness=0.022inch, Voltage Rating=50V, Voltage Rating (DC)=50V, Width=0.02inch
C9: library part GJM1555C1HR50BB01D, "CAP CER 0.5PF 50V C0G/NP0 0402", Case Code (Imperial)=0402, Case Code (Metric)=1005, Dielectric=C0G, Manufacturer=Murata, Max Operating Temperature=125°C, Min Operating Temperature=-55°C, Package Quantity=1, Supplier Part Number 1=490-6077-1-ND, Temperature Coefficient=30ppm/°C, Voltage=50V, Capacitance=0.5pF, Case/Package=0402, Category="Ceramic Capacitors", ComponentLink1Description=https://datasheet.ciiva.com/6270/product-6270544.pdf?src-supplier=Digi-Key, ComponentLink1URL=https://datasheet.ciiva.com/6270/product-6270544.pdf?src-supplier=Digi-Key, ComponentLink2Description=https://datasheet.ciiva.com/11789/0900766b80ef921d-11789028.pdf?src-supplier=RSComponents, ComponentLink2URL=https://datasheet.ciiva.com/11789/0900766b80ef921d-11789028.pdf?src-supplier=RSComponents, ComponentLink3Description=https://datasheet.ciiva.com/5694/1700184-5694998.pdf?src-supplier=Farnell, ComponentLink3URL=https://datasheet.ciiva.com/5694/1700184-5694998.pdf?src-supplier=Farnell, ComponentLink4Description=https://datasheet.ciiva.com/18183/getdatasheetpartid-153078-18183862.pdf?src-supplier=Verical, ComponentLink4URL=https://datasheet.ciiva.com/18183/getdatasheetpartid-153078-18183862.pdf?src-supplier=Verical, ComponentLink5Description=https://datasheet.ciiva.com/8030/1303334-8030134.pdf?src-supplier=Element14, ComponentLink5URL=https://datasheet.ciiva.com/8030/1303334-8030134.pdf?src-supplier=Element14, ComponentLink6Description=https://datasheet.ciiva.com/16392/l0005e-16392585.pdf?src-supplier=Future+Electronics, ComponentLink6URL=https://datasheet.ciiva.com/16392/l0005e-16392585.pdf?src-supplier=Future+Electronics, ComponentLink7Description=https://datasheet.ciiva.com/17451/product-17451306.pdf?src-supplier=Avnet+Europe, ComponentLink7URL=https://datasheet.ciiva.com/17451/product-17451306.pdf?src-supplier=Avnet+Europe, ComponentLink8Description=https://datasheet.ciiva.com/11617/product-11617149.pdf?src-supplier=Avnet, ComponentLink8URL=https://datasheet.ciiva.com/11617/product-11617149.pdf?src-supplier=Avnet, ComponentLink9Description=https://datasheet.ciiva.com/6270/partnumbering-e-01-6270543.pdf?src-supplier=Digi-Key, ComponentLink9URL=https://datasheet.ciiva.com/6270/partnumbering-e-01-6270543.pdf?src-supplier=Digi-Key, Construction=Flat, Depth=0.5mm, Height=0.5mm, Lead Free="Lead Free", Lead Pitch=0.3mm, Length=1mm, Manufacturer Part Number=GJM1555C1HR50BB01D, Mount="Surface Mount", Number of Pins=2, Packaging="Tape and Reel", Pricing 1="1=0.20000, 10=0.13900, 50=0.07920, 100=0.06560, 500=0.04596, 1000=0.03805, 2500=0.03542, 5000=0.03240 (USD)", Radiation Hardening=No, REACH SVHC="No SVHC", RoHS=Yes, RoHS Compliant=Yes, Series=GJM, Stock 1=81547, Supplier 1=Digi-Key, Termination=SMD/SMT, Thickness=0.022inch, Voltage Rating=50V, Voltage Rating (DC)=50V, Width=0.02inch
C17 C23: library part CC0402CRNPO9BN8R0, "CAP CER 8PF 50V C0G/NP0 0402", Capacitor Type=Ceramic, Case/Package=0402, Manufacturer=Yageo, Max Operating Temperature=125°C, Min Operating Temperature=-55°C, Package Shape=Rectangular, Rated DC Voltage (URdc)=50V, Supplier Part Number 1=311-3328-1-ND, Temperature Characteristics Code=C0G, Tolerance  (fill in as +-)=3.12%, Category="Ceramic Capacitors", ComponentLink1Description=https://datasheet.ciiva.com:443/pdfs/VipMasterIC/IC/YAGO/YAGO-S-A0002788200/YAGO-S-A0002788200-1.pdf?src-supplier=IHS+Markit, ComponentLink1URL=https://datasheet.ciiva.com:443/pdfs/VipMasterIC/IC/YAGO/YAGO-S-A0002788200/YAGO-S-A0002788200-1.pdf?src-supplier=IHS+Markit, ComponentLink2Description=http://www.mouser.com/ds/2/447/Yageo_UPY-GP_NP0_16V-to-50V_9-358835.pdf?src-supplier=Mouser, ComponentLink2URL=http://www.mouser.com/ds/2/447/Yageo_UPY-GP_NP0_16V-to-50V_9-358835.pdf?src-supplier=Mouser, ComponentLink3Description=http://www.yageo.com/documents/recent/UPY-GP_NP0_16V-to-50V_16.pdf?src-supplier=Digi-Key, ComponentLink3URL=http://www.yageo.com/documents/recent/UPY-GP_NP0_16V-to-50V_16.pdf?src-supplier=Digi-Key, ComponentLink4Description=https://www.yageo.com/upload/media/product/productsearch/datasheet/mlcc/UPY-GP_NP0_16V-to-50V_18.pdf?src-supplier=Digi-Key, ComponentLink4URL=https://www.yageo.com/upload/media/product/productsearch/datasheet/mlcc/UPY-GP_NP0_16V-to-50V_18.pdf?src-supplier=Digi-Key, ComponentLink5Description=http://www.yageo.com/documents/recent/UPY-GP_NP0_16V-to-50V_9.pdf?src-supplier=Future+Electronics, ComponentLink5URL=http://www.yageo.com/documents/recent/UPY-GP_NP0_16V-to-50V_9.pdf?src-supplier=Future+Electronics, ComponentLink6Description=http://www.yageo.com/NewPortal/yageodocoutput?fileName=/pdf/MLCC/UPY-GP_NP0_16V-to-50V_14.pdf&src-supplier=Digi-Key, ComponentLink6URL=http://www.yageo.com/NewPortal/yageodocoutput?fileName=/pdf/MLCC/UPY-GP_NP0_16V-to-50V_14.pdf&src-supplier=Digi-Key, Dielectric Material=Ceramic, JESD-609 Code=e3, Manufacturer Part Number=CC0402CRNPO9BN8R0, Mounting Technology="Surface Mount", Multilayer=Yes, Packaging="Tape and Reel", Pins=2, Pricing 1="1=0.10000, 10=0.02500, 50=0.01360, 100=0.01110, 500=0.00796, 1000=0.00625, 2500=0.00568, 5000=0.00523 (USD)", Reach SVHC Compliant=Yes, RoHS=Yes, RoHS Compliant=Yes, Stock 1=511644, Supplier 1=Digi-Key, Terminal Finish=Nickel, Termination=Wraparound, Tolerance (fill in as +-)=3.12%
C19: library part CL05B102KB5NNNC, "CAP CER 1000PF 50V X7R 0402", Case Code (Imperial)=0402, Case Code (Metric)=1005, Dielectric=X7R, Manufacturer=Samsung, Max Operating Temperature=125°C, Min Operating Temperature=-55°C, Package Quantity=1, Supplier Part Number 1=1276-1032-6-ND, Tolerance=10%, Voltage=50V, Capacitance=1nF, Case/Package=0402, Category="Ceramic Capacitors", ComponentLink1Description=https://datasheet.ciiva.com/25806/cl05b102kb5nnnc-25806896.pdf?src-supplier=Digi-Key, ComponentLink1URL=https://datasheet.ciiva.com/25806/cl05b102kb5nnnc-25806896.pdf?src-supplier=Digi-Key, ComponentLink2Description=https://datasheet.ciiva.com/15227/getdatasheetpartid-355276-15227190.pdf?src-supplier=Verical, ComponentLink2URL=https://datasheet.ciiva.com/15227/getdatasheetpartid-355276-15227190.pdf?src-supplier=Verical, ComponentLink3Description=https://datasheet.ciiva.com/29198/459222-da-01-en-vs-kondensator-0402-29198191.pdf?src-supplier=Conrad, ComponentLink3URL=https://datasheet.ciiva.com/29198/459222-da-01-en-vs-kondensator-0402-29198191.pdf?src-supplier=Conrad, ComponentLink4Description=https://datasheet.ciiva.com/26309/mlcc-catalogdownload2013-eng-26309020.pdf?src-supplier=Distrelec, ComponentLink4URL=https://datasheet.ciiva.com/26309/mlcc-catalogdownload2013-eng-26309020.pdf?src-supplier=Distrelec, Contact Plating=Tin, Depth=0.5mm, Height=0.5mm, Lead Free="Lead Free", Length=1mm, Manufacturer Part Number=CL05B102KB5NNNC, Material=Ceramic, Mount="Surface Mount", Packaging="Tape and Reel", Pricing 1="1=0.10000, 10=0.03300, 50=0.01800, 100=0.01480, 500=0.01054, 1000=0.00829, 2500=0.00754, 5000=0.00693 (USD)", Radiation Hardening=No, RoHS=Yes, Stock 1=12036728, Supplier 1=Digi-Key, Thickness=0.022inch, Voltage Rating=50V, Voltage Rating (DC)=50V, Width=0.02inch
C21: library part CL05C101JB5NNNC, "CAP CER 100PF 50V C0G/NP0 0402", Case Code (Imperial)=0402, Case Code (Metric)=1005, Dielectric=C0G, Manufacturer=Samsung, Max Operating Temperature=125°C, Min Operating Temperature=-55°C, Package Quantity=10000, Supplier Part Number 1=1276-1025-1-ND, Temperature Coefficient=300ppm/°C, Tolerance=5%, Voltage=50V, Capacitance=100pF, Case/Package=0402, Category="Ceramic Capacitors", ComponentLink1Description=https://datasheet.ciiva.com/15195/getdatasheetpartid-357528-15195665.pdf?src-supplier=Verical, ComponentLink1URL=https://datasheet.ciiva.com/15195/getdatasheetpartid-357528-15195665.pdf?src-supplier=Verical, ComponentLink2Description=https://datasheet.ciiva.com/29198/458492-da-01-en-vs-kondensator-0402-29198529.pdf?src-supplier=Conrad, ComponentLink2URL=https://datasheet.ciiva.com/29198/458492-da-01-en-vs-kondensator-0402-29198529.pdf?src-supplier=Conrad, ComponentLink3Description=https://datasheet.ciiva.com/16379/cl05b104kq5nnnc-16379226.pdf?src-supplier=Future+Electronics, ComponentLink3URL=https://datasheet.ciiva.com/16379/cl05b104kq5nnnc-16379226.pdf?src-supplier=Future+Electronics, Construction=Flat, Contact Plating=Tin, Depth=0.5mm, Height=0.5mm, Length=1mm, Manufacturer Part Number=CL05C101JB5NNNC, Material=Ceramic, Mount="Surface Mount", Packaging="Tape and Reel", Pricing 1="1=0.10000, 10=0.02000, 50=0.01080, 100=0.00880, 500=0.00628, 1000=0.00493, 2500=0.00448, 5000=0.00412 (USD)", Radiation Hardening=No, RoHS=Yes, RoHS Compliant=Yes, Series=CL, Stock 1=4859529, Supplier 1=Digi-Key, Thickness=0.022inch, Voltage Rating=50V, Width=0.02inch
D1: "DIODE SCHOTTKY 30V 2A US2H", Manufacturer=Toshiba, Supplier Part Number 1=CUHS20F30H3FCT-ND, Manufacturer Part Number=CUHS20F30,H3F, Pricing 1="1=0.37000, 10=0.30200, 100=0.20540, 500=0.15408, 1000=0.11556 (USD)", RoHS=No, Stock 1=70970, Supplier 1=Digi-Key
D2 D3: "TVS DIODE 5.5VWM 40VC 0201", Case/Package=SMD/SMT, Clamping Voltage=40V, Manufacturer="TECH PUBLIC", Max Operating Temperature=125°C, Min Operating Temperature=-55°C, Peak Pulse Current=3A, Power Line Protection=No, Resistor Type=Zener, Reverse Standoff Voltage=5.5V, Category=Diodes, ComponentLink1Description=https://datasheet.lcsc.com/lcsc/2005211235_TECH-PUBLIC-TPESD0201G15V_C558460.pdf, ComponentLink1URL=https://datasheet.lcsc.com/lcsc/2005211235_TECH-PUBLIC-TPESD0201G15V_C558460.pdf, Halogen Free="Halogen Free", Lead Free="Lead Free", Manufacturer Part Number=TPESD0201G05V, Mount="Surface Mount", Number of Bidirectional Channels=1, Packaging="Tape and Reel", RoHS=Yes, RoHS Compliant=Yes
D4: library part 19-217/G7C-AN1P2/3T, "LED YLW/GREEN DIFFUSED 1608 SMD", Color=Green,Yellow, Forward Voltage=2V, Manufacturer=Everlight, Supplier Part Number 1=5203-19-217/G7C-AN1P2/3T, Category=LEDs, ComponentLink1Description=https://datasheet.ciiva.com/48679/19-217-g7c-an1p2-3t-48679179.pdf?src-supplier=Avnet, ComponentLink1URL=https://datasheet.ciiva.com/48679/19-217-g7c-an1p2-3t-48679179.pdf?src-supplier=Avnet, Lead Free="Lead Free", Lens Style=Clear,Diffused,Colorless,Rectangular, Manufacturer Part Number=19-217/G7C-AN1P2/3T, Mounting Technology="Surface Mount", Number of LEDs=1, Pins=2, Pricing 1="2635=0.01900, 6250=0.01600, 10000=0.01500, 13335=0.01500, 17860=0.01400, 23080=0.01300 (USD)", RoHS=Yes, RoHS Compliant=Yes, Stock 1=152500, Supplier 1="Win Source Electronics", Viewing Angle=120°
J1: "CONN RCPT USB TYPE C, SMT PINS, TH SHIELD", Manufacturer=XUNPU, Category="USB Connectors", ComponentLink1Description=https://www.lcsc.com/product-detail/USB-Connectors_XUNPU-TYPEC-324G-BCP24_C920230.html, ComponentLink1URL=https://www.lcsc.com/product-detail/USB-Connectors_XUNPU-TYPEC-324G-BCP24_C920230.html, Manufacturer Part Number=TYPEC-324G-BCP24
L1: library part CLH1005T-4N7S-S-NP, "FIXED IND 4.7NH 400MA 180 MOHM", Case/Package=0402, Current Rating=300mA, DC Resistance (DCR)=230mR, Inductor Type=MONOLITHIC, Manufacturer="Chilisin Elec", Max Operating Temperature=125°C, Package Quantity=10000, Self Resonant Frequency=6GHz, Test Frequency=100MHz, Category="Fixed Inductors", ComponentLink1Description=https://datasheet.ciiva.com/11801/0900766b80f10808-11801428.pdf?src-supplier=RSComponents, ComponentLink1URL=https://datasheet.ciiva.com/11801/0900766b80f10808-11801428.pdf?src-supplier=RSComponents, ComponentLink2Description=https://datasheet.ciiva.com/8509/l0075s0083lqg15hn-8509689.pdf?src-supplier=Avnet, ComponentLink2URL=https://datasheet.ciiva.com/8509/l0075s0083lqg15hn-8509689.pdf?src-supplier=Avnet, ComponentLink3Description=https://datasheet.ciiva.com/4976/o05e-4976780.pdf?src-supplier=Mouser, ComponentLink3URL=https://datasheet.ciiva.com/4976/o05e-4976780.pdf?src-supplier=Mouser, ComponentLink4Description=https://datasheet.ciiva.com/8002/66026-8002543.pdf?src-supplier=Element14, ComponentLink4URL=https://datasheet.ciiva.com/8002/66026-8002543.pdf?src-supplier=Element14, ComponentLink5Description=https://datasheet.ciiva.com/1063/l0075s0083lqg15hn-1063843.pdf?src-supplier=Digi-Key, ComponentLink5URL=https://datasheet.ciiva.com/1063/l0075s0083lqg15hn-1063843.pdf?src-supplier=Digi-Key, ComponentLink6Description=https://datasheet.ciiva.com/8510/l0075s0083lqg15hn-8510764.pdf?src-supplier=Avnet, ComponentLink6URL=https://datasheet.ciiva.com/8510/l0075s0083lqg15hn-8510764.pdf?src-supplier=Avnet, DC Current=300mA, Depth=0.55mm, Height=0.02inch, Height - Seated (Max)=0.022inch, Inductance=4.7nH, Lead Free="Lead Free", Length=1mm, Manufacturer Part Number=CLH1005T-4N7S-S-NP, Max DC Current=300mA, Military Standard=Not, Mount="Surface Mount", Number of Pins=2, Packaging="Tape and Reel", Q Factor=8, Radiation Hardening=No, Rated Current-Max=300mA, REACH SVHC="No SVHC", RoHS=Yes, RoHS Compliant=Yes, Series=LQG15HS, Shielding=Unshielded, Termination=SMD/SMT, Width=0.02inch
OSC1: "MEMS OSC XO 32.7680KHZ LVCMOS", Frequency=32.768kHz, Frequency Stability=75ppm, Manufacturer=SiTime, Max Operating Temperature=70°C, Max Supply Current=1.3uA, Min Operating Temperature=-10°C, Supplier Part Number 1=1473-1313-1-ND, Category=Oscillators, ComponentLink1Description=http://www.sitime.com/products/datasheets/sit1532/SiT1532-datasheet.pdf?src-supplier=Digi-Key, ComponentLink1URL=http://www.sitime.com/products/datasheets/sit1532/SiT1532-datasheet.pdf?src-supplier=Digi-Key, ComponentLink2Description=https://www.sitime.com/datasheet/SiT1532?src-supplier=Digi-Key, ComponentLink2URL=https://www.sitime.com/datasheet/SiT1532?src-supplier=Digi-Key, Height=0.024inch, Length=0.061inch, Manufacturer Part Number=SIT1532AC-J5-DCC-32.768E, Mount="Surface Mount", Packaging="Tape and Reel", Pricing 1="1=1.25000, 10=1.10300, 50=1.03120, 100=0.91120, 500=0.86328 (USD)", RoHS=Yes, Stock 1=4488, Supplier 1=Digi-Key, Width=0.033inch
Q1: "MOSFET N/P-CH 20V 0.2A EMT6", Case/Package=SOT-23-5, Continuous Drain Current (ID)=200mA, Drain to Source Resistance=1R, Drain to Source Voltage (Vdss)=20V, Input Capacitance=25pF, Manufacturer=Rohm, Max Operating Temperature=150°C, Max Power Dissipation=150mW, Min Operating Temperature=-55°C, Package Quantity=1, Supplier Part Number 1=EM6M2T2RCT-ND, Category=MOSFETs, ComponentLink1Description=https://datasheet.ciiva.com/6387/em6m2-6387413.pdf?src-supplier=Digi-Key, ComponentLink1URL=https://datasheet.ciiva.com/6387/em6m2-6387413.pdf?src-supplier=Digi-Key, ComponentLink2Description=https://datasheet.ciiva.com/6387/em6m2-6387415.pdf?src-supplier=Digi-Key, ComponentLink2URL=https://datasheet.ciiva.com/6387/em6m2-6387415.pdf?src-supplier=Digi-Key, ComponentLink3Description=https://datasheet.ciiva.com/6387/em6m2-6387417.pdf?src-supplier=Digi-Key, ComponentLink3URL=https://datasheet.ciiva.com/6387/em6m2-6387417.pdf?src-supplier=Digi-Key, Drain-source On Resistance-Max=1R, FET Type="N and P-Channel", Lead Free="Lead Free", Manufacturer Part Number=EM6M2T2R, Mounting Technology="Surface Mount", Packaging="Tape and Reel", Pins=6, Pricing 1="1=0.58000, 10=0.49600, 100=0.37030, 500=0.29096, 1000=0.22482, 2000=0.20499 (USD)", Radiation Hardening=No, Rds On Max=1R, RoHS=Yes, RoHS Compliant=Yes, Stock 1=90900, Supplier 1=Digi-Key
Q2: "MOSFET 2N-CH 20V 0.2A EMT6", Continuous Drain Current (ID)=200mA, Drain to Source Resistance=1.2R, Drain to Source Voltage (Vdss)=20V, Gate to Source Voltage (Vgs)=8V, Input Capacitance=25pF, Manufacturer=Rohm, Max Operating Temperature=150°C, Max Power Dissipation=150mW, Min Operating Temperature=-55°C, Package Quantity=8000, Supplier Part Number 1=EM6K7T2RCT-ND, Category=MOSFETs, ComponentLink1Description=https://datasheet.ciiva.com/6387/em6k7-6387446.pdf?src-supplier=Digi-Key, ComponentLink1URL=https://datasheet.ciiva.com/6387/em6k7-6387446.pdf?src-supplier=Digi-Key, ComponentLink2Description=https://datasheet.ciiva.com/13051/em6k7-209726-13051863.pdf?src-supplier=Mouser, ComponentLink2URL=https://datasheet.ciiva.com/13051/em6k7-209726-13051863.pdf?src-supplier=Mouser, ComponentLink3Description=https://datasheet.ciiva.com/11162/em6k7-11162107.pdf?src-supplier=Avnet, ComponentLink3URL=https://datasheet.ciiva.com/11162/em6k7-11162107.pdf?src-supplier=Avnet, ComponentLink4Description=https://datasheet.ciiva.com/6387/em6k7-6387451.pdf?src-supplier=Digi-Key, ComponentLink4URL=https://datasheet.ciiva.com/6387/em6k7-6387451.pdf?src-supplier=Digi-Key, ComponentLink5Description=https://datasheet.ciiva.com/16437/em6k7-16437677.pdf?src-supplier=Future+Electronics, ComponentLink5URL=https://datasheet.ciiva.com/16437/em6k7-16437677.pdf?src-supplier=Future+Electronics, Drain-source On Resistance-Max=1.2R, Fall Time=10ns, FET Type="2 N-Channel", Lead Free="Lead Free", Manufacturer Part Number=EM6K7T2R, Mounting Technology="Surface Mount", Packaging="Tape and Reel", Pins=6, Pricing 1="1=0.54000, 10=0.43900, 100=0.29900, 500=0.22428, 1000=0.16821, 2000=0.15419 (USD)", Radiation Hardening=No, Rds On Max=1.2R, Rise Time=10ns, RoHS=Yes, RoHS Compliant=Yes, Stock 1=15154, Supplier 1=Digi-Key, Turn-Off Delay Time=15ns, Turn-On Delay Time=5ns
R1 R2: library part RC0402FR-075K1L, "RES SMD 5.1K OHM 1% 1/16W 0402", Case Code (Imperial)=0402, Case Code (Metric)=1005, Manufacturer=Yageo, Max Operating Temperature=155°C, Max Power Dissipation=63mW, Min Operating Temperature=-55°C, Package Quantity=1, Resistance=5.1kR, Resistance Tolerance=1%, Resistor Type="Thick Film", Supplier Part Number 1=311-5.10KLRCT-ND, Temperature Coefficient=100ppm/°C, Voltage Rating=50V, Case/Package=0402, Category="Chip SMD Resistors", ComponentLink1Description=https://datasheet.ciiva.com/2453/pyu-r-int-thick-7-2453400.pdf?src-supplier=Digi-Key, ComponentLink1URL=https://datasheet.ciiva.com/2453/pyu-r-int-thick-7-2453400.pdf?src-supplier=Digi-Key, ComponentLink2Description=https://datasheet.ciiva.com/2453/pyu-r-int-thick-7-2453401.pdf?src-supplier=Digi-Key, ComponentLink2URL=https://datasheet.ciiva.com/2453/pyu-r-int-thick-7-2453401.pdf?src-supplier=Digi-Key, ComponentLink3Description=https://datasheet.ciiva.com/2453/pyu-r-int-thick-7-2453402.pdf?src-supplier=Digi-Key, ComponentLink3URL=https://datasheet.ciiva.com/2453/pyu-r-int-thick-7-2453402.pdf?src-supplier=Digi-Key, ComponentLink4Description=https://datasheet.ciiva.com/12558/pyu-rc0402-51-rohs-l-6-r-8721-12558460.pdf?src-supplier=Mouser, ComponentLink4URL=https://datasheet.ciiva.com/12558/pyu-rc0402-51-rohs-l-6-r-8721-12558460.pdf?src-supplier=Mouser, ComponentLink5Description=https://datasheet.ciiva.com/16744/pyu-rc0402-51-rohs-l-6-r-16744283.pdf?src-supplier=Future+Electronics, ComponentLink5URL=https://datasheet.ciiva.com/16744/pyu-rc0402-51-rohs-l-6-r-16744283.pdf?src-supplier=Future+Electronics, ComponentLink6Description=https://datasheet.ciiva.com/15189/getdatasheetpartid-323636-15189493.pdf?src-supplier=Verical, ComponentLink6URL=https://datasheet.ciiva.com/15189/getdatasheetpartid-323636-15189493.pdf?src-supplier=Verical, ComponentLink7Description=https://datasheet.ciiva.com/7983/1018594-7983519.pdf?src-supplier=Element14, ComponentLink7URL=https://datasheet.ciiva.com/7983/1018594-7983519.pdf?src-supplier=Element14, ComponentLink8Description=https://datasheet.ciiva.com/46394/1018594-46394936.pdf?src-supplier=Element14, ComponentLink8URL=https://datasheet.ciiva.com/46394/1018594-46394936.pdf?src-supplier=Element14, Construction=Rectangular, Depth=0.5mm, Features="Moisture Resistant", Height=0.016inch, Lead Free="Lead Free", Length=1mm, Manufacturer Part Number=RC0402FR-075K1L, Military Standard=Not, Number of Terminations=2, Packaging="Tape and Reel", Power Rating=63mW, Pricing 1="1=0.10000, 10=0.01600, 100=0.00660, 1000=0.00299, 2500=0.00259, 5000=0.00214 (USD)", REACH SVHC=Unknown, RoHS=Yes, RoHS Compliant=Yes, Series=RC, Stock 1=1329359, Supplier 1=Digi-Key, Technology="THICK FILM", Termination=SMD/SMT, Tolerance=1%, Voltage Rating (DC)=50V, Width=0.02inch, Working Voltage=50V
R3 R4 R7 R10 R11 R12 R13 R14 R15 R16: library part RC0402FR-0710KL, "RES SMD 10K OHM 1% 1/16W 0402", Case Code (Imperial)=0402, Case Code (Metric)=1005, Manufacturer=Yageo, Max Operating Temperature=155°C, Max Power Dissipation=63mW, Min Operating Temperature=-55°C, Power Rating=62.5mW, Resistance=10kR, Resistance Tolerance=1%, Resistor Type="Thick Film", Supplier Part Number 1=311-10.0KLRCT-ND, Temperature Coefficient=100ppm/°C, Voltage Rating=50V, Case/Package=0402, Category="Chip SMD Resistors", ComponentLink1Description=https://datasheet.ciiva.com/7660/38568-7660787.pdf?src-supplier=Element14, ComponentLink1URL=https://datasheet.ciiva.com/7660/38568-7660787.pdf?src-supplier=Element14, ComponentLink2Description=https://datasheet.ciiva.com/7983/1018594-7983486.pdf?src-supplier=Element14, ComponentLink2URL=https://datasheet.ciiva.com/7983/1018594-7983486.pdf?src-supplier=Element14, ComponentLink3Description=https://datasheet.ciiva.com/7849/1784430-7849813.pdf?src-supplier=Element14, ComponentLink3URL=https://datasheet.ciiva.com/7849/1784430-7849813.pdf?src-supplier=Element14, ComponentLink4Description=https://datasheet.ciiva.com/7849/1686128-7849814.pdf?src-supplier=Element14, ComponentLink4URL=https://datasheet.ciiva.com/7849/1686128-7849814.pdf?src-supplier=Element14, ComponentLink5Description=https://datasheet.ciiva.com/7849/1784430-7849815.pdf?src-supplier=Element14, ComponentLink5URL=https://datasheet.ciiva.com/7849/1784430-7849815.pdf?src-supplier=Element14, ComponentLink6Description=https://datasheet.ciiva.com/22747/1018594-22747512.pdf?src-supplier=Element14, ComponentLink6URL=https://datasheet.ciiva.com/22747/1018594-22747512.pdf?src-supplier=Element14, ComponentLink7Description=https://datasheet.ciiva.com/12667/pyu-rc0402-51-rohs-l-6-r-12667067.pdf?src-supplier=Mouser, ComponentLink7URL=https://datasheet.ciiva.com/12667/pyu-rc0402-51-rohs-l-6-r-12667067.pdf?src-supplier=Mouser, Construction=Rectangular, Depth=0.5mm, Features="Moisture Resistant", Height=0.32mm, Lead Free="Lead Free", Lead Pitch=0.2mm, Length=1mm, Manufacturer Part Number=RC0402FR-0710KL, Military Standard=Not, Number of Pins=2, Number of Terminations=2, Packaging="Tape and Reel", Pricing 1="1=0.10000, 10=0.01400, 100=0.00580, 1000=0.00260, 2500=0.00226, 5000=0.00186 (USD)", REACH SVHC="No SVHC", RoHS=Yes, RoHS Compliant=Yes, Series=RC, Stock 1=39209283, Supplier 1=Digi-Key, Termination=SMD/SMT, Tolerance=1%, Voltage Rating (DC)=50V, Width=0.5mm, Working Voltage=50V
R5: library part NCP15XH103F03RC, "THERMISTOR NTC 10KOHM 3380K 0402", Case Code (Imperial)=0402, Case Code (Metric)=1005, Current Rating=310uA, Manufacturer=Murata, Max Operating Temperature=125°C, Max Power Dissipation=100mW, Min Operating Temperature=-40°C, Package Quantity=1, Resistance Tolerance=1%, Supplier Part Number 1=490-4801-1-ND, Case/Package=0402, Category=Thermistors, ComponentLink1Description=https://datasheet.ciiva.com/2848/r44e-2848224.pdf?src-supplier=Digi-Key, ComponentLink1URL=https://datasheet.ciiva.com/2848/r44e-2848224.pdf?src-supplier=Digi-Key, ComponentLink2Description=https://datasheet.ciiva.com/2848/r44e-2848223.pdf?src-supplier=Digi-Key, ComponentLink2URL=https://datasheet.ciiva.com/2848/r44e-2848223.pdf?src-supplier=Digi-Key, ComponentLink3Description=https://datasheet.ciiva.com/2848/r44e-2848225.pdf?src-supplier=Digi-Key, ComponentLink3URL=https://datasheet.ciiva.com/2848/r44e-2848225.pdf?src-supplier=Digi-Key, ComponentLink4Description=https://datasheet.ciiva.com/3280/l0770e-3280495.pdf?src-supplier=Avnet, ComponentLink4URL=https://datasheet.ciiva.com/3280/l0770e-3280495.pdf?src-supplier=Avnet, ComponentLink5Description=https://datasheet.ciiva.com/16208/ncp15wb473j03rc-16208150.pdf?src-supplier=Future+Electronics, ComponentLink5URL=https://datasheet.ciiva.com/16208/ncp15wb473j03rc-16208150.pdf?src-supplier=Future+Electronics, Depth=0.5mm, Height=0.5mm, Lead Free="Lead Free", Length=1mm, Manufacturer Part Number=NCP15XH103F03RC, Mounting Technology="Surface Mount", Packaging="Tape and Reel", Pins=2, Power Rating=100mW, Pricing 1="1=0.14000, 5=0.13000, 10=0.11600, 25=0.10360, 50=0.09120, 100=0.07770, 500=0.06428, 1000=0.05381, 5000=0.04783 (USD)", Radiation Hardening=No, Reach SVHC Compliant=Yes, RoHS=Yes, RoHS Compliant=Yes, Series=NCP, Stock 1=408773, Supplier 1=Digi-Key, Termination=SMD/SMT, Tolerance=1%